# EAGLE board GrapherBlanK7_production_flipped_JustHoles (EAGLE 5.10)
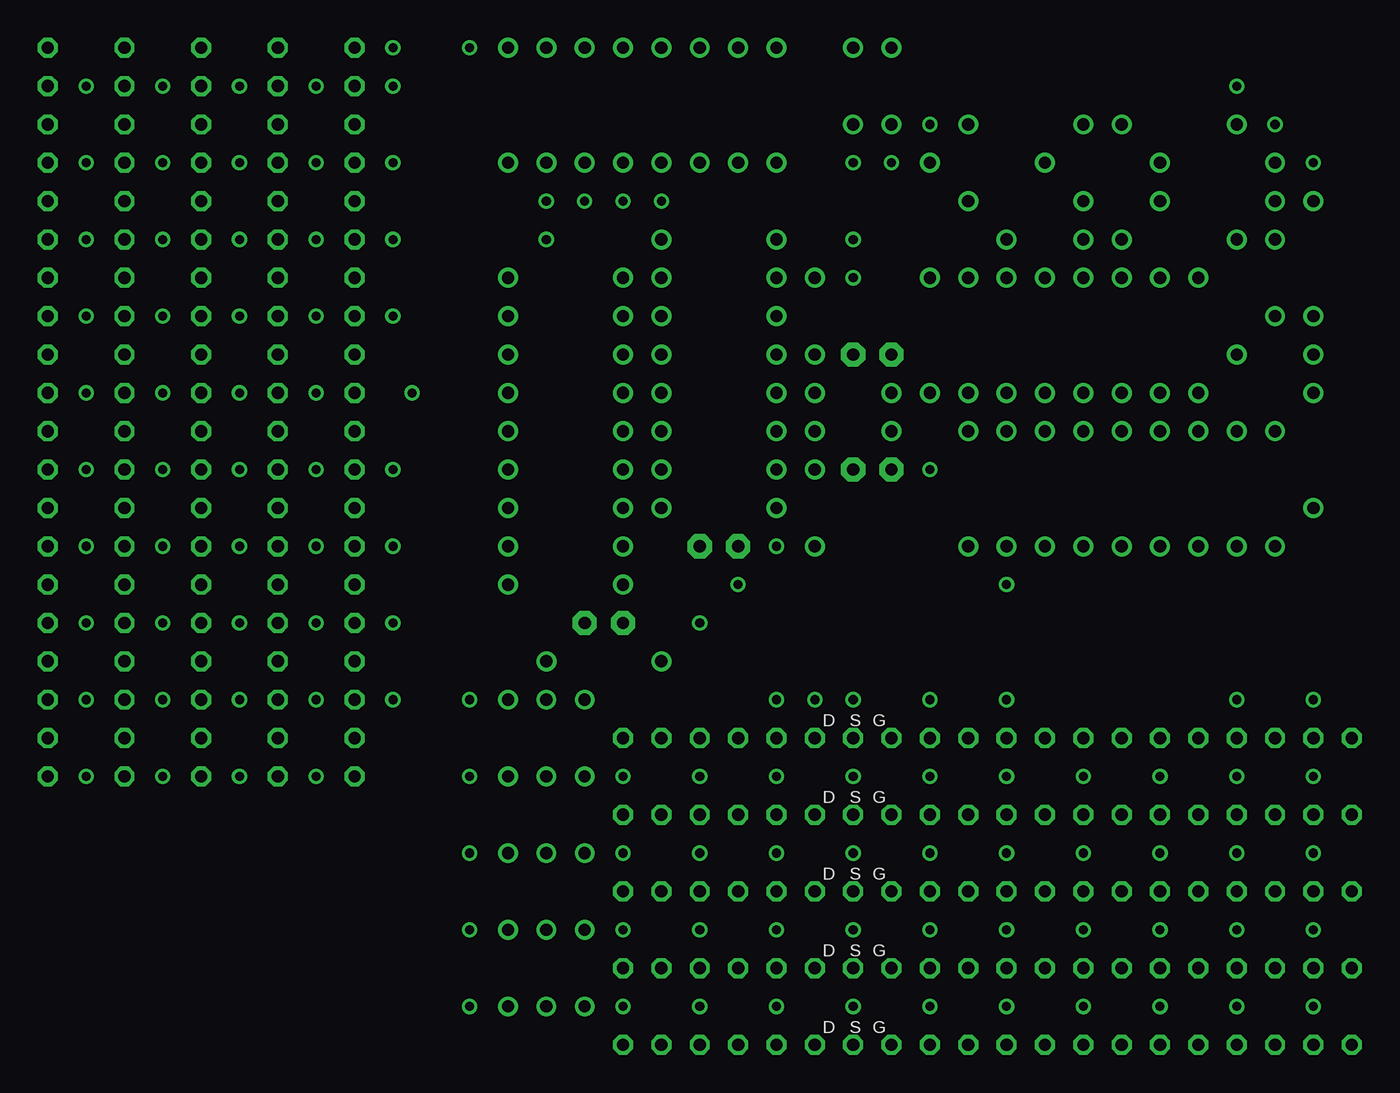
[diagram p0: board, top side]
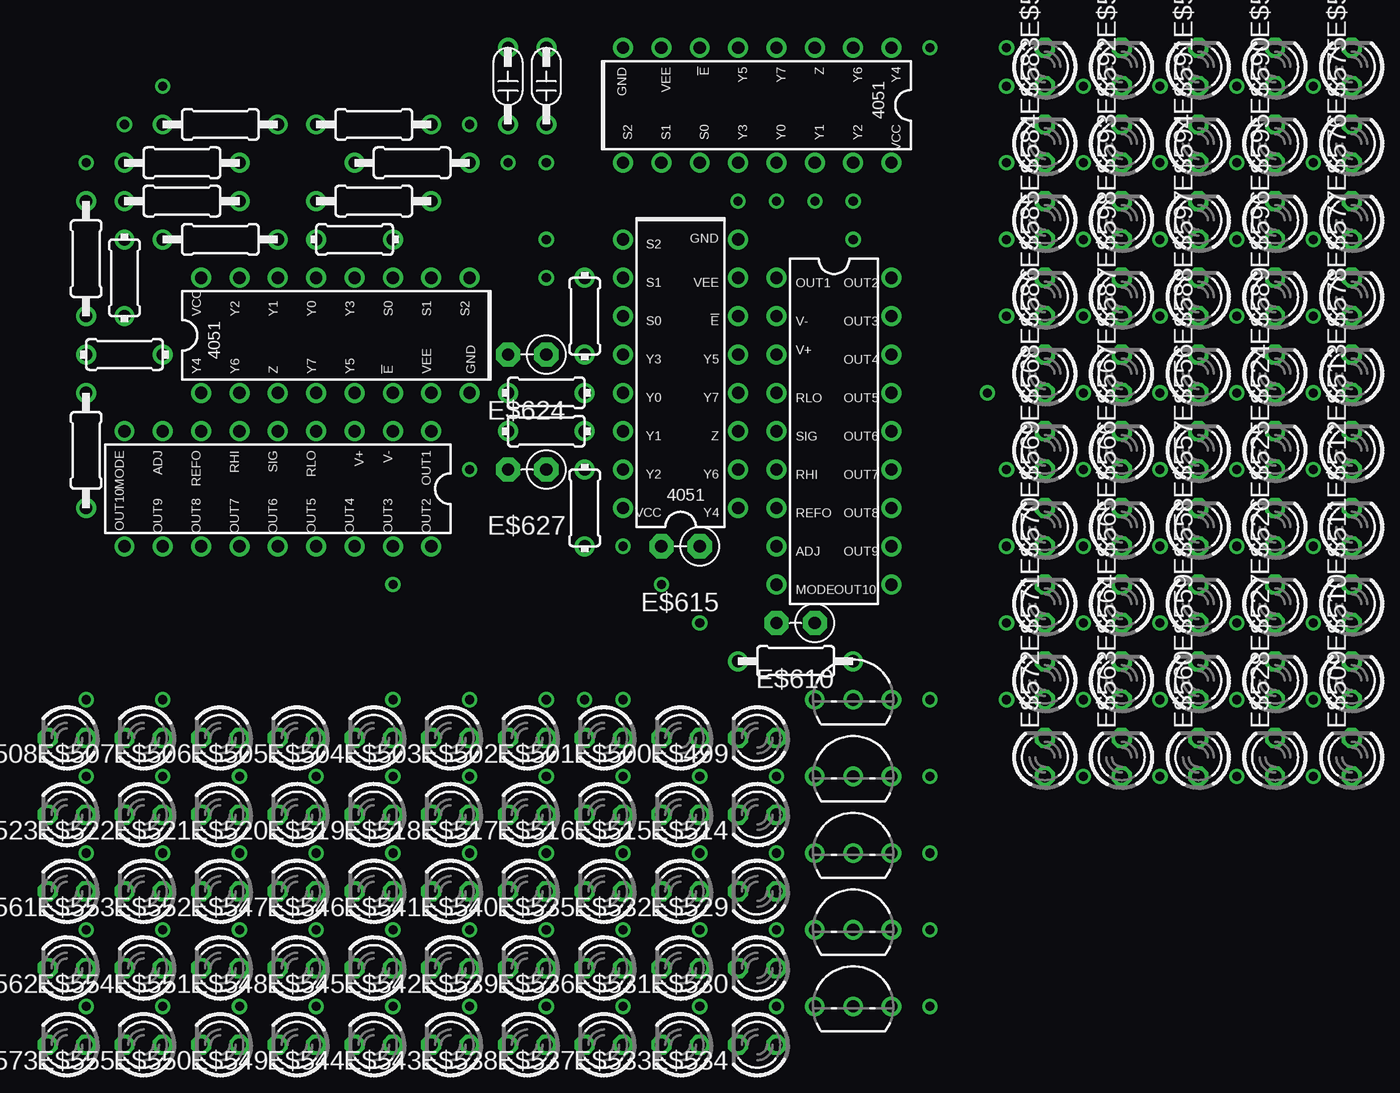
[diagram p1: board, bottom side, seen from below]

No outline drawn. Coordinates in mm, seen from the top.
Copper layers (1*16): Top 0.035mm / dielectric 1.5mm / Bottom 0.035mm
Design rules "default": minimum track width 10mil, minimum drill 24mil, track to track 8mil, track to pad 8mil, pad to pad 8mil, via to via 8mil, smd to smd 8mil, copper to edge 40mil, drill to drill 8mil, minimum pad ring 10mil, minimum via ring 8mil, stop-mask expansion 4mil, vias tented up to drill 0mil, thermal gap 10mil
Milling: 1 lines

## Footprints (pad centres in the part's own frame; a part is rotated, then mirrored left to right if it is on the bottom)
RESISTOR-S2 = drill 0.813 round: IN1 -2.54,0; IN2 2.54,0
SMALL-CAPACITOR = drill 0.813 round: IN1 0,0; IN2 5.08,0
LED3MM = drill 0.813 octagon: A -1.27,0; K 1.27,0
LM3914-10LED-BARGRAPH = drill 0.813 round: 1!R -3.81,1.27; 1!S -3.81,3.81; 1Q 3.81,1.27; 2!R -3.81,-3.81; 2!S -3.81,-6.35; 2Q 3.81,-8.89; 2Q1 3.81,-11.43; 2Q3 -3.81,-11.43; 3!R 3.81,-1.27; 3!S 3.81,-3.81; 3Q 3.81,-6.35; 4!R 3.81,3.81; 4!S 3.81,6.35; 4Q -3.81,8.89; GND -3.81,-8.89; NC -3.81,6.35; OE -3.81,-1.27; VCC 3.81,8.89
4051-ANALOG-MUX = drill 0.813 round: CLOCK 3.81,-6.35; GND -3.81,-8.89; Q0 3.81,-8.89; Q1 -3.81,-6.35; Q2 -3.81,-3.81; Q3 -3.81,-1.27; Q4 -3.81,3.81; Q5 -3.81,6.35; Q6 -3.81,1.27; Q7 3.81,1.27; Q8 3.81,-1.27; Q9 3.81,3.81; Q10 3.81,6.35; Q11 -3.81,8.89; RESET 3.81,-3.81; VCC 3.81,8.89
RESISTOR = drill 0.813 round: IN1 -3.81,0; IN2 3.81,0
RS-2,5 = drill 0.813 pad 1.6 octagon: 1 -1.27,0; 2 1.27,0
TRANSISTOR = drill 0.8 round: P$1 0,0; P$2 2.54,0; P$3 -2.54,0

## Placement (x,y rotation side)
E$1  [RESISTOR-S2]  53.34,38.1 90 bottom
E$2  [RESISTOR-S2]  55.88,45.72 180 bottom
E$3  [RESISTOR-S2]  55.88,43.18 180 bottom
E$5  [SMALL-CAPACITOR]  55.88,63.5 90 bottom
E$6  [SMALL-CAPACITOR]  58.42,63.5 90 bottom
E$499  [LED3MM]  41.91,22.86 180 bottom
E$500  [LED3MM]  46.99,22.86 180 bottom
E$501  [LED3MM]  52.07,22.86 180 bottom
E$502  [LED3MM]  57.15,22.86 180 bottom
E$503  [LED3MM]  62.23,22.86 180 bottom
E$504  [LED3MM]  67.31,22.86 180 bottom
E$505  [LED3MM]  72.39,22.86 180 bottom
E$506  [LED3MM]  77.47,22.86 180 bottom
E$507  [LED3MM]  82.55,22.86 180 bottom
E$508  [LED3MM]  87.63,22.86 180 bottom
E$509  [LED3MM]  2.54,21.59 90 bottom
E$510  [LED3MM]  2.54,26.67 90 bottom
E$511  [LED3MM]  2.54,31.75 90 bottom
E$512  [LED3MM]  2.54,36.83 90 bottom
E$513  [LED3MM]  2.54,41.91 90 bottom
E$514  [LED3MM]  41.91,17.78 180 bottom
E$515  [LED3MM]  46.99,17.78 180 bottom
E$516  [LED3MM]  52.07,17.78 180 bottom
E$517  [LED3MM]  57.15,17.78 180 bottom
E$518  [LED3MM]  62.23,17.78 180 bottom
E$519  [LED3MM]  67.31,17.78 180 bottom
E$520  [LED3MM]  72.39,17.78 180 bottom
E$521  [LED3MM]  77.47,17.78 180 bottom
E$522  [LED3MM]  82.55,17.78 180 bottom
E$523  [LED3MM]  87.63,17.78 180 bottom
E$524  [LED3MM]  7.62,41.91 90 bottom
E$525  [LED3MM]  7.62,36.83 90 bottom
E$526  [LED3MM]  7.62,31.75 90 bottom
E$527  [LED3MM]  7.62,26.67 90 bottom
E$528  [LED3MM]  7.62,21.59 90 bottom
E$529  [LED3MM]  41.91,12.7 180 bottom
E$530  [LED3MM]  41.91,7.62 180 bottom
E$531  [LED3MM]  46.99,7.62 180 bottom
E$532  [LED3MM]  46.99,12.7 180 bottom
E$533  [LED3MM]  46.99,2.54 180 bottom
E$534  [LED3MM]  41.91,2.54 180 bottom
E$535  [LED3MM]  52.07,12.7 180 bottom
E$536  [LED3MM]  52.07,7.62 180 bottom
E$537  [LED3MM]  52.07,2.54 180 bottom
E$538  [LED3MM]  57.15,2.54 180 bottom
E$539  [LED3MM]  57.15,7.62 180 bottom
E$540  [LED3MM]  57.15,12.7 180 bottom
E$541  [LED3MM]  62.23,12.7 180 bottom
E$542  [LED3MM]  62.23,7.62 180 bottom
E$543  [LED3MM]  62.23,2.54 180 bottom
E$544  [LED3MM]  67.31,2.54 180 bottom
E$545  [LED3MM]  67.31,7.62 180 bottom
E$546  [LED3MM]  67.31,12.7 180 bottom
E$547  [LED3MM]  72.39,12.7 180 bottom
E$548  [LED3MM]  72.39,7.62 180 bottom
E$549  [LED3MM]  72.39,2.54 180 bottom
E$550  [LED3MM]  77.47,2.54 180 bottom
E$551  [LED3MM]  77.47,7.62 180 bottom
E$552  [LED3MM]  77.47,12.7 180 bottom
E$553  [LED3MM]  82.55,12.7 180 bottom
E$554  [LED3MM]  82.55,7.62 180 bottom
E$555  [LED3MM]  82.55,2.54 180 bottom
E$556  [LED3MM]  12.7,41.91 90 bottom
E$557  [LED3MM]  12.7,36.83 90 bottom
E$558  [LED3MM]  12.7,31.75 90 bottom
E$559  [LED3MM]  12.7,26.67 90 bottom
E$560  [LED3MM]  12.7,21.59 90 bottom
E$561  [LED3MM]  87.63,12.7 180 bottom
E$562  [LED3MM]  87.63,7.62 180 bottom
E$563  [LED3MM]  17.78,21.59 90 bottom
E$564  [LED3MM]  17.78,26.67 90 bottom
E$565  [LED3MM]  17.78,31.75 90 bottom
E$566  [LED3MM]  17.78,36.83 90 bottom
E$567  [LED3MM]  17.78,41.91 90 bottom
E$568  [LED3MM]  22.86,41.91 90 bottom
E$569  [LED3MM]  22.86,36.83 90 bottom
E$570  [LED3MM]  22.86,31.75 90 bottom
E$571  [LED3MM]  22.86,26.67 90 bottom
E$572  [LED3MM]  22.86,21.59 90 bottom
E$573  [LED3MM]  87.63,2.54 180 bottom
E$574  [LED3MM]  2.54,67.31 90 bottom
E$575  [LED3MM]  2.54,62.23 90 bottom
E$576  [LED3MM]  2.54,57.15 90 bottom
E$577  [LED3MM]  2.54,52.07 90 bottom
E$578  [LED3MM]  2.54,46.99 90 bottom
E$579  [LED3MM]  7.62,67.31 90 bottom
E$580  [LED3MM]  12.7,67.31 90 bottom
E$581  [LED3MM]  17.78,67.31 90 bottom
E$582  [LED3MM]  22.86,67.31 90 bottom
E$583  [LED3MM]  22.86,62.23 90 bottom
E$584  [LED3MM]  22.86,57.15 90 bottom
E$585  [LED3MM]  22.86,52.07 90 bottom
E$586  [LED3MM]  22.86,46.99 90 bottom
E$587  [LED3MM]  17.78,46.99 90 bottom
E$588  [LED3MM]  12.7,46.99 90 bottom
E$589  [LED3MM]  7.62,46.99 90 bottom
E$590  [LED3MM]  7.62,62.23 90 bottom
E$591  [LED3MM]  12.7,62.23 90 bottom
E$592  [LED3MM]  17.78,62.23 90 bottom
E$593  [LED3MM]  17.78,57.15 90 bottom
E$594  [LED3MM]  12.7,57.15 90 bottom
E$595  [LED3MM]  7.62,57.15 90 bottom
E$596  [LED3MM]  7.62,52.07 90 bottom
E$597  [LED3MM]  12.7,52.07 90 bottom
E$598  [LED3MM]  17.78,52.07 90 bottom
E$599  [LM3914-10LED-BARGRAPH]  72.39,39.37 270 bottom
E$600  [4051-ANALOG-MUX]  69.85,49.53 90 bottom
E$601  [RESISTOR-S2]  83.82,48.26 0 bottom
E$602  [RESISTOR]  86.36,41.91 90 bottom
E$603  [RESISTOR]  77.47,63.5 180 bottom
E$604  [RESISTOR]  80.01,58.42 180 bottom
E$605  [RESISTOR]  77.47,55.88 180 bottom
E$606  [RESISTOR]  80.01,60.96 180 bottom
E$607  [RESISTOR]  67.31,58.42 180 bottom
E$609  [RESISTOR-S2]  68.58,55.88 0 bottom
E$610  [RS-2,5]  39.37,30.48 180 bottom
E$611  [RESISTOR]  86.36,54.61 90 bottom
E$613  [LM3914-10LED-BARGRAPH]  36.83,44.45 0 bottom
E$614  [4051-ANALOG-MUX]  46.99,46.99 180 bottom
E$615  [RS-2,5]  46.99,35.56 180 bottom
E$616  [RESISTOR]  39.37,27.94 0 bottom
E$617  [TRANSISTOR]  35.56,20.32 0 bottom
E$618  [TRANSISTOR]  35.56,25.4 0 bottom
E$619  [TRANSISTOR]  35.56,15.24 0 bottom
E$620  [TRANSISTOR]  35.56,10.16 0 bottom
E$621  [TRANSISTOR]  35.56,5.08 0 bottom
E$623  [4051-ANALOG-MUX]  41.91,64.77 270 bottom
E$624  [RS-2,5]  57.15,48.26 180 bottom
E$627  [RS-2,5]  57.15,40.64 180 bottom
E$628  [RESISTOR-S2]  53.34,50.8 90 bottom
E$629  [RESISTOR]  64.77,60.96 180 bottom
E$630  [RESISTOR]  67.31,63.5 180 bottom
E$631  [RESISTOR-S2]  83.82,53.34 90 bottom

## Library data of the parts
E$1-E$3 E$5 E$6 E$599-E$607 E$609 E$611 E$613 E$614 E$616-E$621 E$623 E$628-E$631 = RussellLibrary
E$499-E$598 = led
E$610 E$615 E$624 E$627 = discrete

## Nets
S$4: E$501.K
S$89: E$599.4!S
S$218: E$623.Q11

## Tracks (layer width: path | path; a pad name or v marks a point on that pad's centre or on a via)
S$1  (via drill 0.6)
  other vias: 25.4,68.58
S$2  (via drill 0.6)
  other vias: 40.64,5.08
S$3  (via drill 0.6)
  other vias: 35.56,55.88
S$4  (via drill 0.6)
  other vias: 53.34,22.86
S$5  (via drill 0.6)
  other vias: 45.72,5.08
S$6  (via drill 0.6)
  other vias: 50.8,5.08
S$7  (via drill 0.6)
  other vias: 55.88,5.08
S$8  (via drill 0.6)
  other vias: 60.96,5.08
S$9  (via drill 0.6)
  other vias: 66.04,5.08
S$10  (via drill 0.6)
  other vias: 71.12,5.08
S$11  (via drill 0.6)
  other vias: 76.2,5.08
S$12  (via drill 0.6)
  other vias: 81.28,5.08
S$13  (via drill 0.6)
  other vias: 86.36,5.08
S$14  (via drill 0.6)
  other vias: 40.64,10.16
S$15  (via drill 0.6)
  other vias: 45.72,10.16
S$16  (via drill 0.6)
  other vias: 50.8,10.16
S$17  (via drill 0.6)
  other vias: 55.88,10.16
S$18  (via drill 0.6)
  other vias: 60.96,10.16
S$19  (via drill 0.6)
  other vias: 66.04,10.16
S$20  (via drill 0.6)
  other vias: 71.12,10.16
S$21  (via drill 0.6)
  other vias: 76.2,10.16
S$22  (via drill 0.6)
  other vias: 81.28,10.16
S$23  (via drill 0.6)
  other vias: 86.36,10.16
S$24  (via drill 0.6)
  other vias: 86.36,15.24
S$25  (via drill 0.6)
  other vias: 81.28,15.24
S$26  (via drill 0.6)
  other vias: 76.2,15.24
S$27  (via drill 0.6)
  other vias: 71.12,15.24
S$28  (via drill 0.6)
  other vias: 66.04,15.24
S$29  (via drill 0.6)
  other vias: 60.96,15.24
S$30  (via drill 0.6)
  other vias: 55.88,15.24
S$31  (via drill 0.6)
  other vias: 50.8,15.24
S$32  (via drill 0.6)
  other vias: 45.72,15.24
S$33  (via drill 0.6)
  other vias: 40.64,15.24
S$34  (via drill 0.6)
  other vias: 40.64,20.32
S$35  (via drill 0.6)
  other vias: 45.72,20.32
S$36  (via drill 0.6)
  other vias: 50.8,20.32
S$37  (via drill 0.6)
  other vias: 55.88,20.32
S$38  (via drill 0.6)
  other vias: 60.96,20.32
S$39  (via drill 0.6)
  other vias: 66.04,20.32
S$40  (via drill 0.6)
  other vias: 71.12,20.32
S$41  (via drill 0.6)
  other vias: 76.2,20.32
S$42  (via drill 0.6)
  other vias: 81.28,20.32
S$43  (via drill 0.6)
  other vias: 86.36,20.32
S$44  (via drill 0.6)
  other vias: 50.8,25.4
S$45  (via drill 0.6)
  other vias: 55.88,25.4
S$46  (via drill 0.6)
  other vias: 5.08,66.04
S$47  (via drill 0.6)
  other vias: 5.08,60.96
S$48  (via drill 0.6)
  other vias: 5.08,55.88
S$49  (via drill 0.6)
  other vias: 5.08,50.8
S$50  (via drill 0.6)
  other vias: 5.08,45.72
S$51  (via drill 0.6)
  other vias: 5.08,40.64
S$52  (via drill 0.6)
  other vias: 5.08,35.56
S$53  (via drill 0.6)
  other vias: 5.08,30.48
S$54  (via drill 0.6)
  other vias: 5.08,25.4
S$55  (via drill 0.6)
  other vias: 10.16,66.04
S$56  (via drill 0.6)
  other vias: 10.16,60.96
S$57  (via drill 0.6)
  other vias: 10.16,55.88
S$58  (via drill 0.6)
  other vias: 10.16,50.8
S$59  (via drill 0.6)
  other vias: 10.16,45.72
S$60  (via drill 0.6)
  other vias: 10.16,40.64
S$61  (via drill 0.6)
  other vias: 10.16,35.56
S$62  (via drill 0.6)
  other vias: 10.16,30.48
S$63  (via drill 0.6)
  other vias: 10.16,25.4
S$64  (via drill 0.6)
  other vias: 15.24,66.04
S$65  (via drill 0.6)
  other vias: 15.24,60.96
S$66  (via drill 0.6)
  other vias: 15.24,55.88
S$67  (via drill 0.6)
  other vias: 15.24,50.8
S$68  (via drill 0.6)
  other vias: 15.24,45.72
S$69  (via drill 0.6)
  other vias: 15.24,40.64
S$70  (via drill 0.6)
  other vias: 15.24,35.56
S$71  (via drill 0.6)
  other vias: 15.24,30.48
S$72  (via drill 0.6)
  other vias: 15.24,25.4
S$73  (via drill 0.6)
  other vias: 20.32,25.4
S$74  (via drill 0.6)
  other vias: 20.32,30.48
S$75  (via drill 0.6)
  other vias: 20.32,35.56
S$76  (via drill 0.6)
  other vias: 20.32,40.64
S$77  (via drill 0.6)
  other vias: 20.32,45.72
S$78  (via drill 0.6)
  other vias: 20.32,50.8
S$79  (via drill 0.6)
  other vias: 20.32,55.88
S$80  (via drill 0.6)
  other vias: 20.32,60.96
S$81  (via drill 0.6)
  other vias: 20.32,66.04
S$82  (via drill 0.6)
  other vias: 20.32,20.32
S$83  (via drill 0.6)
  other vias: 15.24,20.32
S$84  (via drill 0.6)
  other vias: 10.16,20.32
S$85  (via drill 0.6)
  other vias: 5.08,20.32
S$87  (via drill 0.6)
  other vias: 30.48,68.58
S$89  (via drill 0.6)
  other vias: 66.04,35.56
S$90  (via drill 0.6)
  other vias: 25.4,30.48
S$91  (via drill 0.6)
  other vias: 25.4,35.56
S$92  (via drill 0.6)
  other vias: 25.4,40.64
S$93  (via drill 0.6)
  other vias: 26.67,45.72
S$94  (via drill 0.6)
  other vias: 25.4,50.8
S$95  (via drill 0.6)
  other vias: 25.4,55.88
S$96  (via drill 0.6)
  other vias: 25.4,66.04
S$97  (via drill 0.6)
  other vias: 66.04,33.02
S$98  (via drill 0.6)
  other vias: 55.88,60.96
S$99  (via drill 0.6)
  other vias: 53.34,25.4
S$100  (via drill 0.6)
  other vias: 45.72,30.48
S$195  (via drill 0.6)
  other vias: 25.4,25.4
S$201  (via drill 0.6)
  other vias: 81.28,25.4
S$202  (via drill 0.6)
  other vias: 86.36,25.4
S$211  (via drill 0.6)
  other vias: 25.4,60.96
S$213  (via drill 0.6)
  other vias: 66.04,25.4
S$214  (via drill 0.6)
  other vias: 60.96,40.64
S$215  (via drill 0.6)
  other vias: 50.8,35.56
S$218  (via drill 0.6)
  other vias: 33.02,68.58
S$219  (via drill 0.6)
  other vias: 30.48,5.08
S$220  (via drill 0.6)
  other vias: 30.48,10.16
S$221  (via drill 0.6)
  other vias: 30.48,15.24
S$222  (via drill 0.6)
  other vias: 30.48,20.32
S$226  (via drill 0.6)
  other vias: 60.96,25.4
S$228  (via drill 0.6)
  other vias: 35.56,58.42
S$229  (via drill 0.6)
  other vias: 38.1,58.42
S$230  (via drill 0.6)
  other vias: 43.18,58.42
S$231  (via drill 0.6)
  other vias: 40.64,58.42
S$234  (via drill 0.6)
  other vias: 55.88,55.88
S$237  (via drill 0.6)
  other vias: 30.48,25.4
S$251  (via drill 0.6)
  other vias: 48.26,33.02
S$253  (via drill 0.6)
  other vias: 58.42,60.96
S$254  (via drill 0.6)
  other vias: 60.96,63.5
S$255  (via drill 0.6)
  other vias: 86.36,60.96
S$256  (via drill 0.6)
  other vias: 81.28,66.04
S$257  (via drill 0.6)
  other vias: 83.82,63.5
S$259  (via drill 0.6)
  other vias: 55.88,53.34

## Text on the board
tPlace: D | S | G | D | S | G | D | S | G | D | S | G | D | S | G